# Altium PCB Temp Supervisor.PcbDoc
Units mm, origin at the board's own origin, x right, y up, seen from the top; angles counter-clockwise.
Board outline 24 x 22 mm, 2 copper layers (Top Layer, Bottom Layer), stack 1.671 mm thick; 29 components, 17 nets, 79 pads, 51 vias.
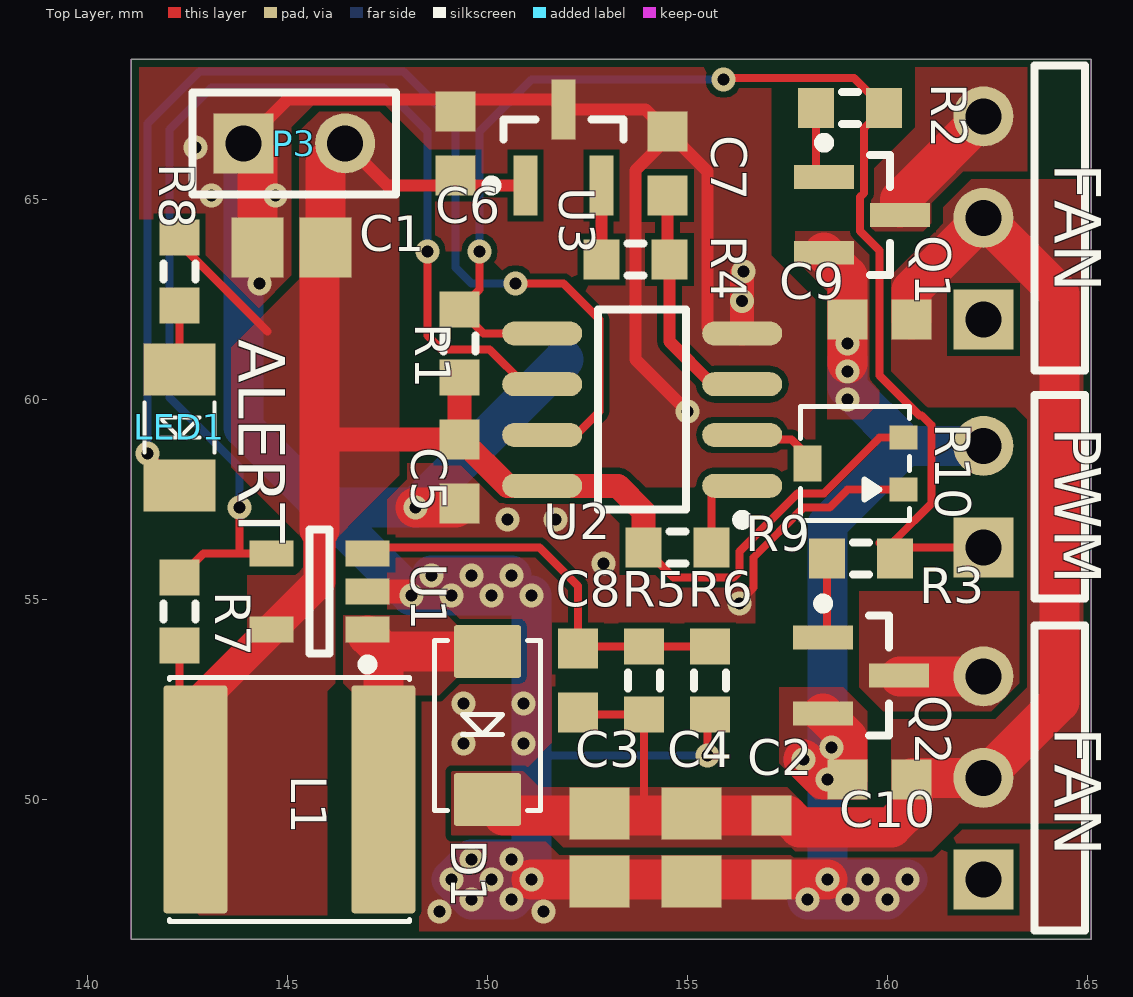
[diagram p0: Top Layer view]
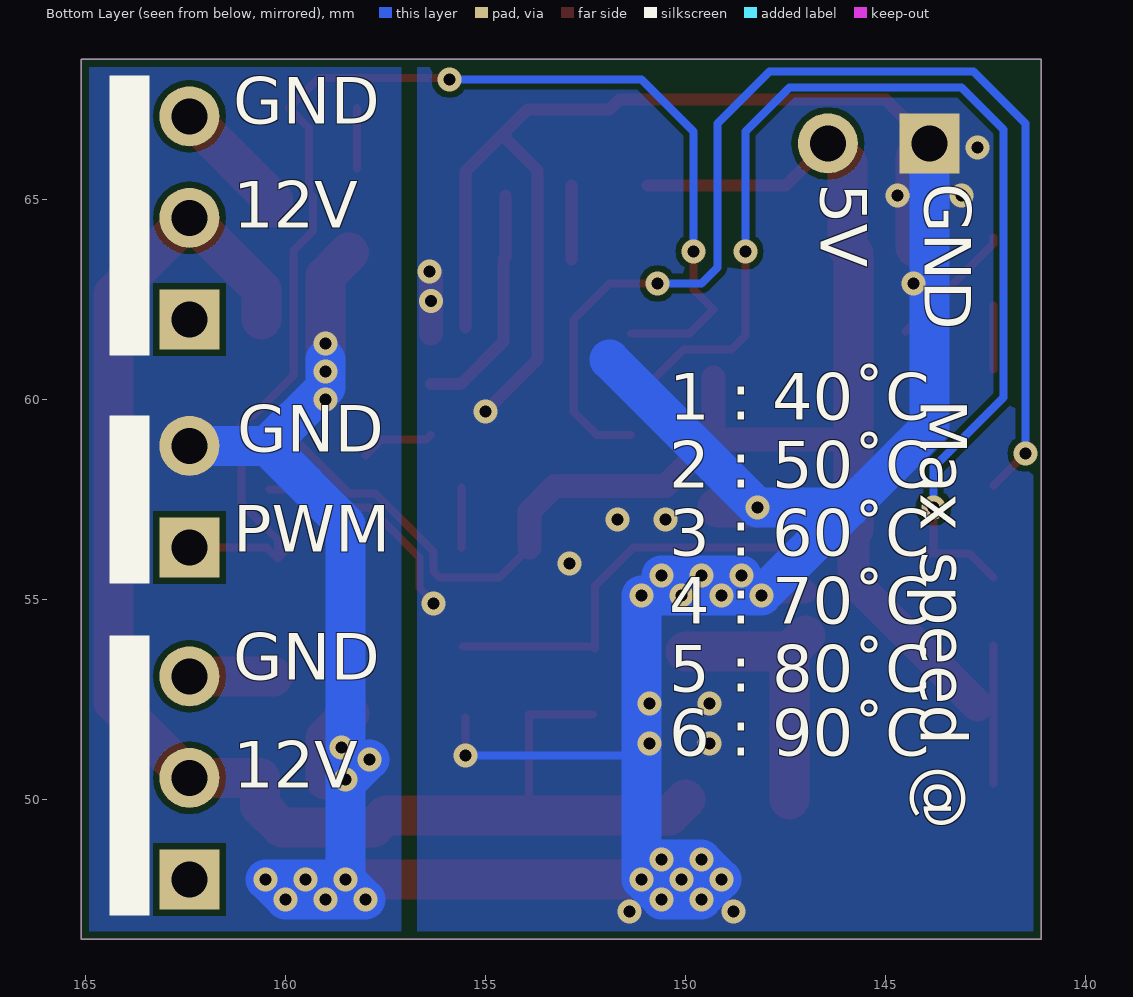
[diagram p1: Bottom Layer view, seen from below]

## Layer stack, top to bottom
Top Layer: signal copper 0.0356
Dielectric: core 1.6, FR-4, Dk 4.6
Bottom Layer: signal copper 0.0356

## Board outline
141.1,68.5 141.1,46.5 165.1,46.5 165.1,68.5

## Design rules (kind name [scope] priority, off if disabled: settings)
Clearance [All] p1: gap=0.152
HoleSize [All] p1: absolutevalues=TRUE maxlimit=6.3 minlimit=0.3 maxpercent=80.000 minpercent=20.000
PolygonConnect [All] p1: connectstyle=Direct reliefconductorwidth=0.254 reliefentries=4 polygonreliefangle="90 Angle" airgapwidth=0.254
RoutingVias [All] p1: holewidth=0.3 width=0.6 viastyle="Through Hole" minholewidth=0.3 minwidth=0.6 maxholewidth=6.3 maxwidth=7
SolderMaskExpansion [All] p1: expansion=0.05
Width [All] p1: maxlimit=12.7 minlimit=0.152 preferedwidth=0.152
27 further rules are at their usual default settings.

## Components (designator, comment, footprint, x,y, rotation, side; value= is the part's Value field where it differs from the comment)
C1 "10µF" CAPC2012N 145.1,63.8 r0 top
C2 "100nF" CAPC1608N 157.1,48.8 r90 top
C3 "10µF" CAPC2012N 152.8,48.8 r90 top
C4 "10µF" CAPC2012N 155.1,48.8 r90 top
C5 "100nF" CAPC1608N 149.3,58.2 r90 top
C6 "100nF" CAPC1608N 149.2,66.4 r270 top
C7 "100nF" CAPC1608N 154.5,65.9 r270 top
C8 "220pF" CAPC1608N 152.265,52.972 r270 top
C9 "100nF" CAPC1608N 159.8,62 r0 top
C10 "100nF" CAPC1608N 159.8,50.5 r0 top
D1 "" DO-214AC 150,53.7 r90 top
L1 "6.8µH" "INDUCTOR 6×6mm Taiyo Yuden" 142.7,50 r0 top
LED1 "" "LED 3216m" 142.3,59.3 r270 top
P3 "Header 2" HDR1X2 143.9,66.4 r0 top
Q1 "IRFML8244TRPBF" SOT23-3N 159.365,64.618 r0 top
Q2 "IRFML8244TRPBF" SOT23-3N 159.343,53.099 r0 top
R1 "10K" RESC1608N 149.3,61.4 r270 top
R2 "330" RESC1608N 159.065,67.285 r180 top
R3 "330" RESC1608N 159.343,56.02 r180 top
R4 "0" RESC1608N 153.7,63.5 r180 top
R5 "" RESC1608N 153.916,52.972 r270 top
R6 "" RESC1608N 155.567,52.972 r90 top
R7 "10K" RESC1608N 142.3,54.7 r270 top
R8 "330" RESC1608N 142.3,63.2 r90 top
R9 "10K" RESC1608N 154.75,56.3 r180 top
R10 "*" "Trim-Pot 2mm SMD" 160.4,59 r90 top
U1 "LMR62014" SOT23-5AN 145.8,55.2 r180 top
U2 "ATtiny13A" SOIC127P600-8AN 153.868,59.747 r180 top
U3 "LMT90" SOT23-3N 151.9,66.3 r90 top

## Footprints (in the part's own frame and the unit in brackets; to place one, negate y for a bottom-side part, rotate by r counter-clockwise, add the part's x,y. Pads: shape width x height; smd on the part's side, far side on the other; paste and mask are expansions set on the pad)
CAPC1608N [mm] "Chip Capacitor, Body 1.6x0.8mm, IPC Medium Density"
  rect 1x1 smd: 1(-0.8,0) 2(0.8,0)
  body extent -0.87,-0.48 0.87,0.48, height 0.85
CAPC2012N [mm] "Chip Capacitor, Body 2.0x1.3mm, IPC Medium Density"
  rect 1.3x1.5 smd: 1(-0.85,0) 2(0.85,0)
  body extent -1.1,-0.72 1.1,0.72, height 1.1
DO-214AC [mm] "DO-214AC Diode 4.25×2.65mm"
  rrect10% 1.32x1.68 smd: A(0,0) K(-3.7,0)
  silkscreen extent -3.98,-1.33 0.28,1.33, body extent -3.98,-1.33 0.28,1.33, height 2.15
HDR1X2 [mm] "Connector; Header; 2 Position"
  rect 1.5x1.5 hole 0.9: 1(0,0)
  round 1.5 hole 0.9: 2(2.54,0)
  silkscreen extent -1.27,-1.27 3.81,1.27
"INDUCTOR 6×6mm Taiyo Yuden" [mm] "Inductor 6×6mm body Taiyo Yuden SMD Power"
  rrect10% 1.6x5.7 smd: 1(0,0) 2(4.7,0)
  silkscreen extent -0.65,-3.05 5.35,3.05, body extent -0.63,-2.99 5.35,2.99, height 2.8
"LED 3216m" [mm] "LED 3.2×1.6mm"
  rect 1.3x1.8 smd: A(-1.45,0) K(1.45,0)
  silkscreen extent -0.63,-0.87 0.63,0.87, body extent -1.6,-0.8 1.6,0.8, height 1
RESC1608N [mm] "Chip Resistor, Body 1.6x0.8mm, IPC Medium Density"
  rect 0.9x1 smd: 1(-0.85,0) 2(0.85,0)
  silkscreen extent -0.2,-0.4 0.2,0.4, body extent -0.85,-0.48 0.85,0.48, height 0.6
SOIC127P600-8AN [mm] "SOIC, 8-Leads, Body 4.9x3.9mm, Pitch 1.27mm, IPC Medium Density"
  oval 2x0.6 smd: 1(-2.5,1.905) 2(-2.5,0.635) 3(-2.5,-0.635) 4(-2.5,-1.905) 5(2.5,-1.905) 6(2.5,-0.635) 7(2.5,0.635) 8(2.5,1.905)
  silkscreen extent -2.63,-2.5 1.1,2.88, body extent -2,-2.5 2,2.5, height 2.72
SOT23-3N [mm] "SOT23, 3-Leads, Body 2.9x1.3mm, Pitch 0.95mm, Lead Span 2.5mm, IPC Medium Density"
  rect 1.5x0.6 smd: 1(-0.95,0.95) 2(-0.95,-0.95) 3(0.95,0)
  silkscreen extent -1.07,-1.5 0.7,1.92, body extent -0.7,-1.5 0.7,1.5, height 1.1
SOT23-5AN [mm] "SOT23, 5-Leads, Body 2.9x1.6mm, Pitch 0.95mm, Lead Span 2.8mm, IPC Medium Density"
  rect 1.1x0.65 smd: 1(-1.2,0.95) 2(-1.2,0) 3(-1.2,-0.95) 4(1.2,-0.95) 5(1.2,0.95)
  silkscreen extent -1.33,-1.55 0.25,1.95, body extent -0.9,-1.55 0.9,1.55, height 1.45
"Trim-Pot 2mm SMD" [mm] "SMD Trim potentiometer 2.1mm x 2.7mm"
  rect 0.6x0.7 smd: 1(-1.25,0) 3(0.05,0)
  rect 0.9x0.7 smd: 2(-0.6,2.4)
  silkscreen extent -2.02,-0.15 0.82,2.58, body extent -1.9,-0.03 0.7,2.45, height 0.8

## Part data
C1 C2 C3 C4 C5 C6 C7 C8 C9 C10: library part Capacitor
D1: library part "Diode Schottky"
L1: library part Inductor
LED1: library part LED
P3: "Header, 2-Pin"
Q1 Q2: library part "MOSFET N-Ch enh"
R1 R2 R3 R4 R5 R6 R7 R8 R9: library part Resistor
R10: library part Potentiometer

## Free pads (board coordinates)
  rect 1.5x1.5 hole 0.9: 1(162.4,48) 1(162.4,56.3) 1(162.4,62)
  round 1.5 hole 0.9: 2(162.4,50.54) 2(162.4,58.84) 2(162.4,64.54) 3(162.4,53.08) 3(162.4,67.08)

## Via types
v1: diameter 0.6, hole 0.3, Top Layer to Bottom Layer, tented both sides, 51 vias

## Nets (pads, with @x,y where several pads share a name; then routed paths per layer and width w, separated by ;. In a path a pad name is that pad's centre, name@x,y a point inside that pad or via, vN(x,y) a via of type N, cw(c..) or ccw(c..) an arc to the next point about the centre after c; other vN are vias at no path point)
GND: C1.1 C2.1 C3.1 C4.1 C5.1 C6.1 C7.1 C9.1 C10.1 P3.1 pad.2@162.4,58.84 Q1.2 Q2.2 R6.1 R10.1 U1.2 U2.4 U3.3 | length 115.1
  Top Layer w0.2: v1(155.5,51.1) R6.1@155.5,52.055 ; v1(156.3,54.9) 156.3,54.94 156.655,55.295 156.655,56.055 157.9,57.3 158.555,57.3 159.005,57.75 R10.1
  Top Layer w0.3: P3.1 145,67.5 151.65,67.5 U3.3 153.95,67.25 C7.1 ; v1(155,59.7) 153.7,61 153.7,64.47 153.698,64.472 153.698,65.725 154.5,66.528 C7.1 ; U2.4@155.5,61.8 155.5,65.7 C7.1
  Top Layer w0.6: U1.2 148,55.2 v1(148.1,55.1) ; U2.4 v1(156.368,62.468) v1@156.368,63.168
  Top Layer w1: P3.1 144.25,66.05 C1.1 ; v1(148.2,57.3) C5.1@149.2,57.3 ; v1(151.1,48) C2.1 v1(158.5,48) ; v1(157.9,51) 158.4,50.5 C10.1 159,51.542 Q2.2 ; Q1.2 159,63.083 C9.1 v1@159,60.9
  Bottom Layer w0.2: 151.1,51.1 v1(155.5,51.1)
  Bottom Layer w1: P3.1 143.9,59.3 145.9,57.3 ; v1(148.6,55.6) v1(149.6,55.6) v1(150.6,55.6) ; v1(150.6,48.5) v1(149.6,48.5) v1(149.1,48) v1(149.6,47.5) v1(150.6,47.5) v1(151.1,48) 151.1,51.1 v1(151.1,55.1) v1(150.1,55.1) v1(149.1,55.1) v1(148.1,55.1) 145.9,57.3 ; 151.9,61 v1(148.2,57.3) 145.9,57.3 ; v1(157.9,51) v1@158.5,50.4 ; v1@159,61 159,60.3 160.46,58.84 ; pad.2@162.4,58.84 160.46,58.84 ; v1(158.5,48) v1@158.5,50.4 ; v1(158.5,48) v1(158,47.5) v1(159,47.5) v1(160,47.5) v1(160.5,48) v1(158.5,48) ; v1@158.5,50.4 v1(158.5,50.5) 158.5,56.88 160.46,58.84
  other v1: 148.8,47.2 151.4,47.2 150.1,48 159.5,48 158.6,51.3 149.4,51.4 150.9,51.4 149.4,52.4 150.9,52.4 152.9,55.9 150.5,57 151.7,57 159,60 159,60.7 159,61.4 144.3,62.9 156.4,63.2 143.1,65.1 144.7,65.1 142.7,66.3
NetC7_2: C7.2 R4.1 U2.3 | length 5.9
  Top Layer w0.3: R4.1@154.5,63.55 C7.2 ; R4.1 154.55,61.45 155.618,60.382 U2.3
NetC8_1: C8.1 R5.1 R6.2 U1.3 | length 10.3
  Top Layer w0.2: U1.3@147.15,56.3 151.3,56.3 152.265,55.335 C8.1 ; C8.1@152.315,53.822 R6.2
NetD1_A: D1.A L1.2 U1.1 | length 6.9
  Top Layer w1: U1.1@147,54.1 147.4,53.7 ; L1.2 147.4,53.7 ; D1.A 147.4,53.7
NetLED1_A: LED1.A R8.1 | length 1.6
  Top Layer w0.2: LED1.A R8.1
NetLED1_K: LED1.K U2.7 | length 29.9
  Top Layer w0.2: v1(141.5,58.65) LED1.K ; v1(150.7,62.9) 151.9,62.9 152.8,62 152.8,59.7 152.212,59.112 U2.7
  Bottom Layer w0.2: v1(141.5,58.65) 141.5,66.9 142.8,68.2 147.9,68.2 149.2,66.9 149.2,63.3 149.6,62.9 v1(150.7,62.9)
NetP1_3: pad.3@162.4,67.08 Q1.3 | length 3.1
  Top Layer w1: Q1.3@160.315,64.8 160.315,64.995 pad.3@162.4,67.08
NetP2_3: pad.3@162.4,53.08 Q2.3 | length 2.1
  Top Layer w1: Q2.3@160.312,53.08 pad.3@162.4,53.08
NetP4_1: pad.1@162.4,56.3 R1.1 R2.1 R3.1 U2.5 | length 33.5
  Top Layer w0.2: v1(149.8,63.7) 149.8,62.75 R1.1 149.898,61.652 U2.5 ; v1(155.9,68) 155.937,68.037 159.163,68.037 R2.1 159.417,66.787 159.417,65.163 159.313,65.059 159.313,64.213 159.8,63.726 159.8,60.6 160.798,59.602 160.855,59.602 161.1,59.357 161.1,57.4 160.193,56.493 R3.1 ; R3.1@159.8,56.413 R3.1 ; R3.1@160.455,56.282 R3.1 ; R3.1@160.473,56.3 pad.1@162.4,56.3
  Bottom Layer w0.2: v1(149.8,63.7) 149.8,66.7 151.1,68 v1(155.9,68)
NetQ1_1: Q1.1 R2.2 | length 1.5
  Top Layer w0.2: Q1.1@158.215,65.768 R2.2
NetQ2_1: Q2.1 R3.2 | length 1.9
  Top Layer w0.2: Q2.1@158.493,54.149 R3.2
NetR4_2: R4.2 U3.2 | length 1.9
  Top Layer w0.3: R4.2 U3.2
NetR7_1: R7.1 U1.4 U2.6 | length 29.7
  Top Layer w0.2: R7.1 142.9,56.15 143.8,56.15 ; v1(143.8,57.3) 143.8,56.15 ; U1.4 143.8,56.15 ; v1(148.5,63.7) 148.5,61.6 148.848,61.252 150.052,61.252 150.923,60.382 U2.6
  Bottom Layer w0.2: v1(143.8,57.3) 143.8,58.3 142.052,60.048 142.052,66.752 143.1,67.8 147.4,67.8 148.5,66.7 v1(148.5,63.7)
NetR9_1: R9.1 U2.1 | length 1.5
  Top Layer w0.2: R9.1 U2.1@155.6,57.8
NetR10_2: R10.2 U2.2 | length 1.8
  Top Layer w0.2: U2.2 156.482,58.998 157.602,58.998 R10.2@158,58.6
V5: C1.2 C5.2 C6.2 L1.1 P3.2 R1.2 R7.2 R8.2 R9.2 R10.3 U1.5 U2.8 U3.1 | length 47
  Top Layer w0.2: L1.1@142.3,50.4 R7.2 ; R8.2 142.3,63.9 144.5,61.7 ; R9.2 154.652,55.548 156.155,55.548 156.302,55.695 156.302,56.201 157.754,57.652 158.409,57.652 159.807,59.05 R10.3
  Top Layer w0.3: P3.2 147.49,65.35 U3.1
  Top Layer w0.6: 145.9,59 C5.2 ; R1.2 C5.2 ; R9.2 153.9,57.2 153.258,57.842 U2.8 150.498,57.842 149.34,59 C5.2
  Top Layer w0.8: L1.1@142.7,52.35 U1.5 145.8,55.45 145.8,56.748
  Top Layer w1: 145.8,56.748 145.8,63.65 C1.2 145.95,65.91 P3.2
V12: C2.2 C3.2 C4.2 C8.2 C9.2 C10.2 D1.K pad.2@162.4,50.54 pad.2@162.4,64.54 R5.2 | length 36.6
  Top Layer w0.2: C8.2@152.315,52.122 R5.2 153.916,49.616
  Top Layer w1: D1.K 150.4,49.6 C2.2 157.5,49.6 157.8,49.3 160.1,49.3 160.64,49.84 160.64,50.54 162.4,50.54 164.3,52.44 164.3,62.64 162.4,64.54 160.6,62.74 C9.2

## Polygon pours and split planes (outlines as drawn)
GND on Top Layer "Bottom Layer-No Net" (solid, remove dead copper, pour order 20): 141.3,68.3 141.3,64.5 142.8,64.5 142.8,63.4 144.1,62.1 145.1,63.1 145.1,66.8 145.7,67.4 147.4,67.4 148.7,66.1 148.7,63.9 148.5,63.7 149.9,63.7 150.7,62.9 151.9,62.9 152.8,62 152.8,57.8 158.2,57.8 158.2,62.5 157.1,63.6 157.1,68.3
NetD1_A on Top Layer "Bottom Layer-No Net" (solid, remove dead copper, pour order 2): 146.4,54.6 146.4,52.9 146.7,52.6 148.1,52.6 148.8,52.6 149.3,53.1 149.3,54.3 149,54.6
V5 on Top Layer "Bottom Layer-No Net" (solid, remove dead copper, pour order 4): 146.5,67.2 145.8,67.2 145.3,66.7 145.3,63.8 145.3,63 144.9,62.6 143.6,61.3 143.6,58.3 145.3,56.6 145.4,56.5 145.4,55.8 145.2,55.6 144,55.6 144,54.2 142.6,52.8 142.7,52.7 142.7,47.2 142.8,47.1 146,47.1 146,52.7 146.2,52.9 146.2,56.5 146.7,57 147.8,58.1 147.8,62.1 147.8,66.7 147.3,67.2
GND on Top Layer "Bottom Layer-No Net" (solid, remove dead copper, pour order 8): 151.9,48.6 151.8,48.6 151.5,48.9 151.4,49 149,49 149,50.8 151,50.8 151.7,51.5 151.7,54.3 152.265,54.3 152.265,55.335 151.3,56.3 147.5,56.3 147.5,54.9 147.5,54.7 149.1,54.7 149.3,54.5 150.9,54.5 150.9,52.9 149.3,52.9 148.9,52.5 148.3,52.5 148.3,46.7 164.9,46.7 164.9,49.3 161.9,49.3 161.2,48.6
V12 on Top Layer "Bottom Layer-No Net" (solid, remove dead copper, pour order 6): 149.1,50.7 149.1,49.1 151.6,49.1 151.9,48.8 157.6,48.8 157.7,48.7 161.1,48.7 161.8,49.4 164.9,49.4 164.9,65.5 162.1,65.5 161.4,64.8 161.4,64.4 160.1,63.1 160.1,60.7 161,59.8 163.2,59.8 163.5,59.5 163.5,52.8 162.7,52 160.1,52 160.1,50 159.9,49.8 158,49.8 157.5,50.3 151.3,50.3 150.9,50.7
NetP1_3 on Top Layer "Bottom Layer-No Net" (solid, remove dead copper, pour order 10): 160.7,68.3 163.5,68.3 163.5,65.7 161.9,65.7 161.1,64.9 161.1,64.4 160.9,64.2 159.6,64.2 159.6,65 159.6,65.7 160.7,66.8
NetP2_3 on Top Layer "Bottom Layer-No Net" (solid, remove dead copper, pour order 12): 163.3,54.7 163.3,52.9 162.6,52.2 160.1,52.2 159.9,52.2 159.3,52.8 159.3,53.5 159.3,55.2 163.3,55.2
GND on Top Layer "Bottom Layer-No Net" (solid, remove dead copper, pour order 14): 159.5,50 159.5,52.2 158.9,52.8 157.3,52.8 157.3,50.9 158.2,50
GND on Top Layer "Bottom Layer-No Net" (solid, remove dead copper, pour order 22): 159.3,64.2 159.8,63.726 159.8,59.9 159.4,59.5 158.5,59.5 158.5,62.7 157.7,63.5 157.7,64.2
GND on Top Layer "Bottom Layer-No Net" (solid, remove dead copper, pour order 24): 148,58.4 149.3,58.4 150.2,57.5 150.3,57.4 152.6,57.4 152.8,57.4 153.3,56.9 153.3,55.7 153.3,55.6 154.2,55.6 154.5,55.3 156.1,55.3 156.649,55.3 156.655,55.295 156.7,55.249 156.7,54.4 152.6,54.4 152.5,54.4 152.5,55.4 151.4,56.5 147.5,56.5 147.5,57.5 148,58
GND on Bottom Layer "Bottom Layer-No Net" (solid, remove dead copper, pour order 16): 157.1,46.7 164.9,46.7 164.9,68.3 157.1,68.3
GND on Bottom Layer "Bottom Layer-No Net" (solid, remove dead copper, pour order 18): 141.3,46.7 156.7,46.7 156.7,68.3 141.3,68.3

## Keep-outs
Keep-Out Layer:
  the board outline again, w0

## Silkscreen, mask and mechanical layers (free items; w line width, h text height)
Top Overlay:
  lines w0.2: 163.67,46.73 163.67,54.35 164.94,54.35 164.94,46.73 163.67,46.73 ; 163.67,55.03 164.94,55.03 164.94,60.11 163.67,60.11 163.67,55.03 ; 163.67,60.73 163.67,68.35 164.94,68.35 164.94,60.73 163.67,60.73
  text "FAN" at 163.8,65.9 h2 r270
  text "ALERT" at 143.4,61.5 h2 r270
  text "PWM" at 163.8,59.3 h2 r270
  text "FAN" at 163.8,51.8 h2 r270
Bottom Overlay:
  rectangle: 163.4,61.1 164.4,68.1
  rectangle: 163.4,47.1 164.4,54.1
  rectangle: 163.4,55.4 164.4,59.6
  text "GND" at 161.3,66.5 h2
  text "GND" at 144.4,65.4 h2 r90
  text "5V" at 147,65.4 h2 r90
  text "12V" at 161.3,63.9 h2
  text "Max speed @" at 144.5,60 h2 r90
  text "1 : 40˚C" at 150.4,59.1 h2
  text "GND" at 161.2,58.3 h2
  text "2 : 50˚C" at 150.4,57.4 h2
  text "PWM" at 161.3,55.8 h2
  text "3 : 60˚C" at 150.4,55.7 h2
  text "4 : 70˚C" at 150.4,54 h2
  text "GND" at 161.3,52.6 h2
  text "5 : 80˚C" at 150.4,52.3 h2
  text "6 : 90˚C" at 150.4,50.7 h2
  text "12V" at 161.3,49.9 h2
Top Solder:
  rectangle: 141.3,56.7 143.3,58.2
Bottom Solder:
  rectangle: 141.3,56.7 143.3,58.2